# Altium PCB B293A MiRLIN Integrated PIC32.PcbDoc (part 2 of 3)
Units mm, origin at the board's own origin, x right, y up, seen from the top; angles counter-clockwise.
Board outline 134.25 x 90.25 mm, 4 copper layers (Component Side, Ground Plane, Power Plane, Solder Side), stack 0.651 mm thick; 223 components, 154 nets, 813 pads, 160 vias.
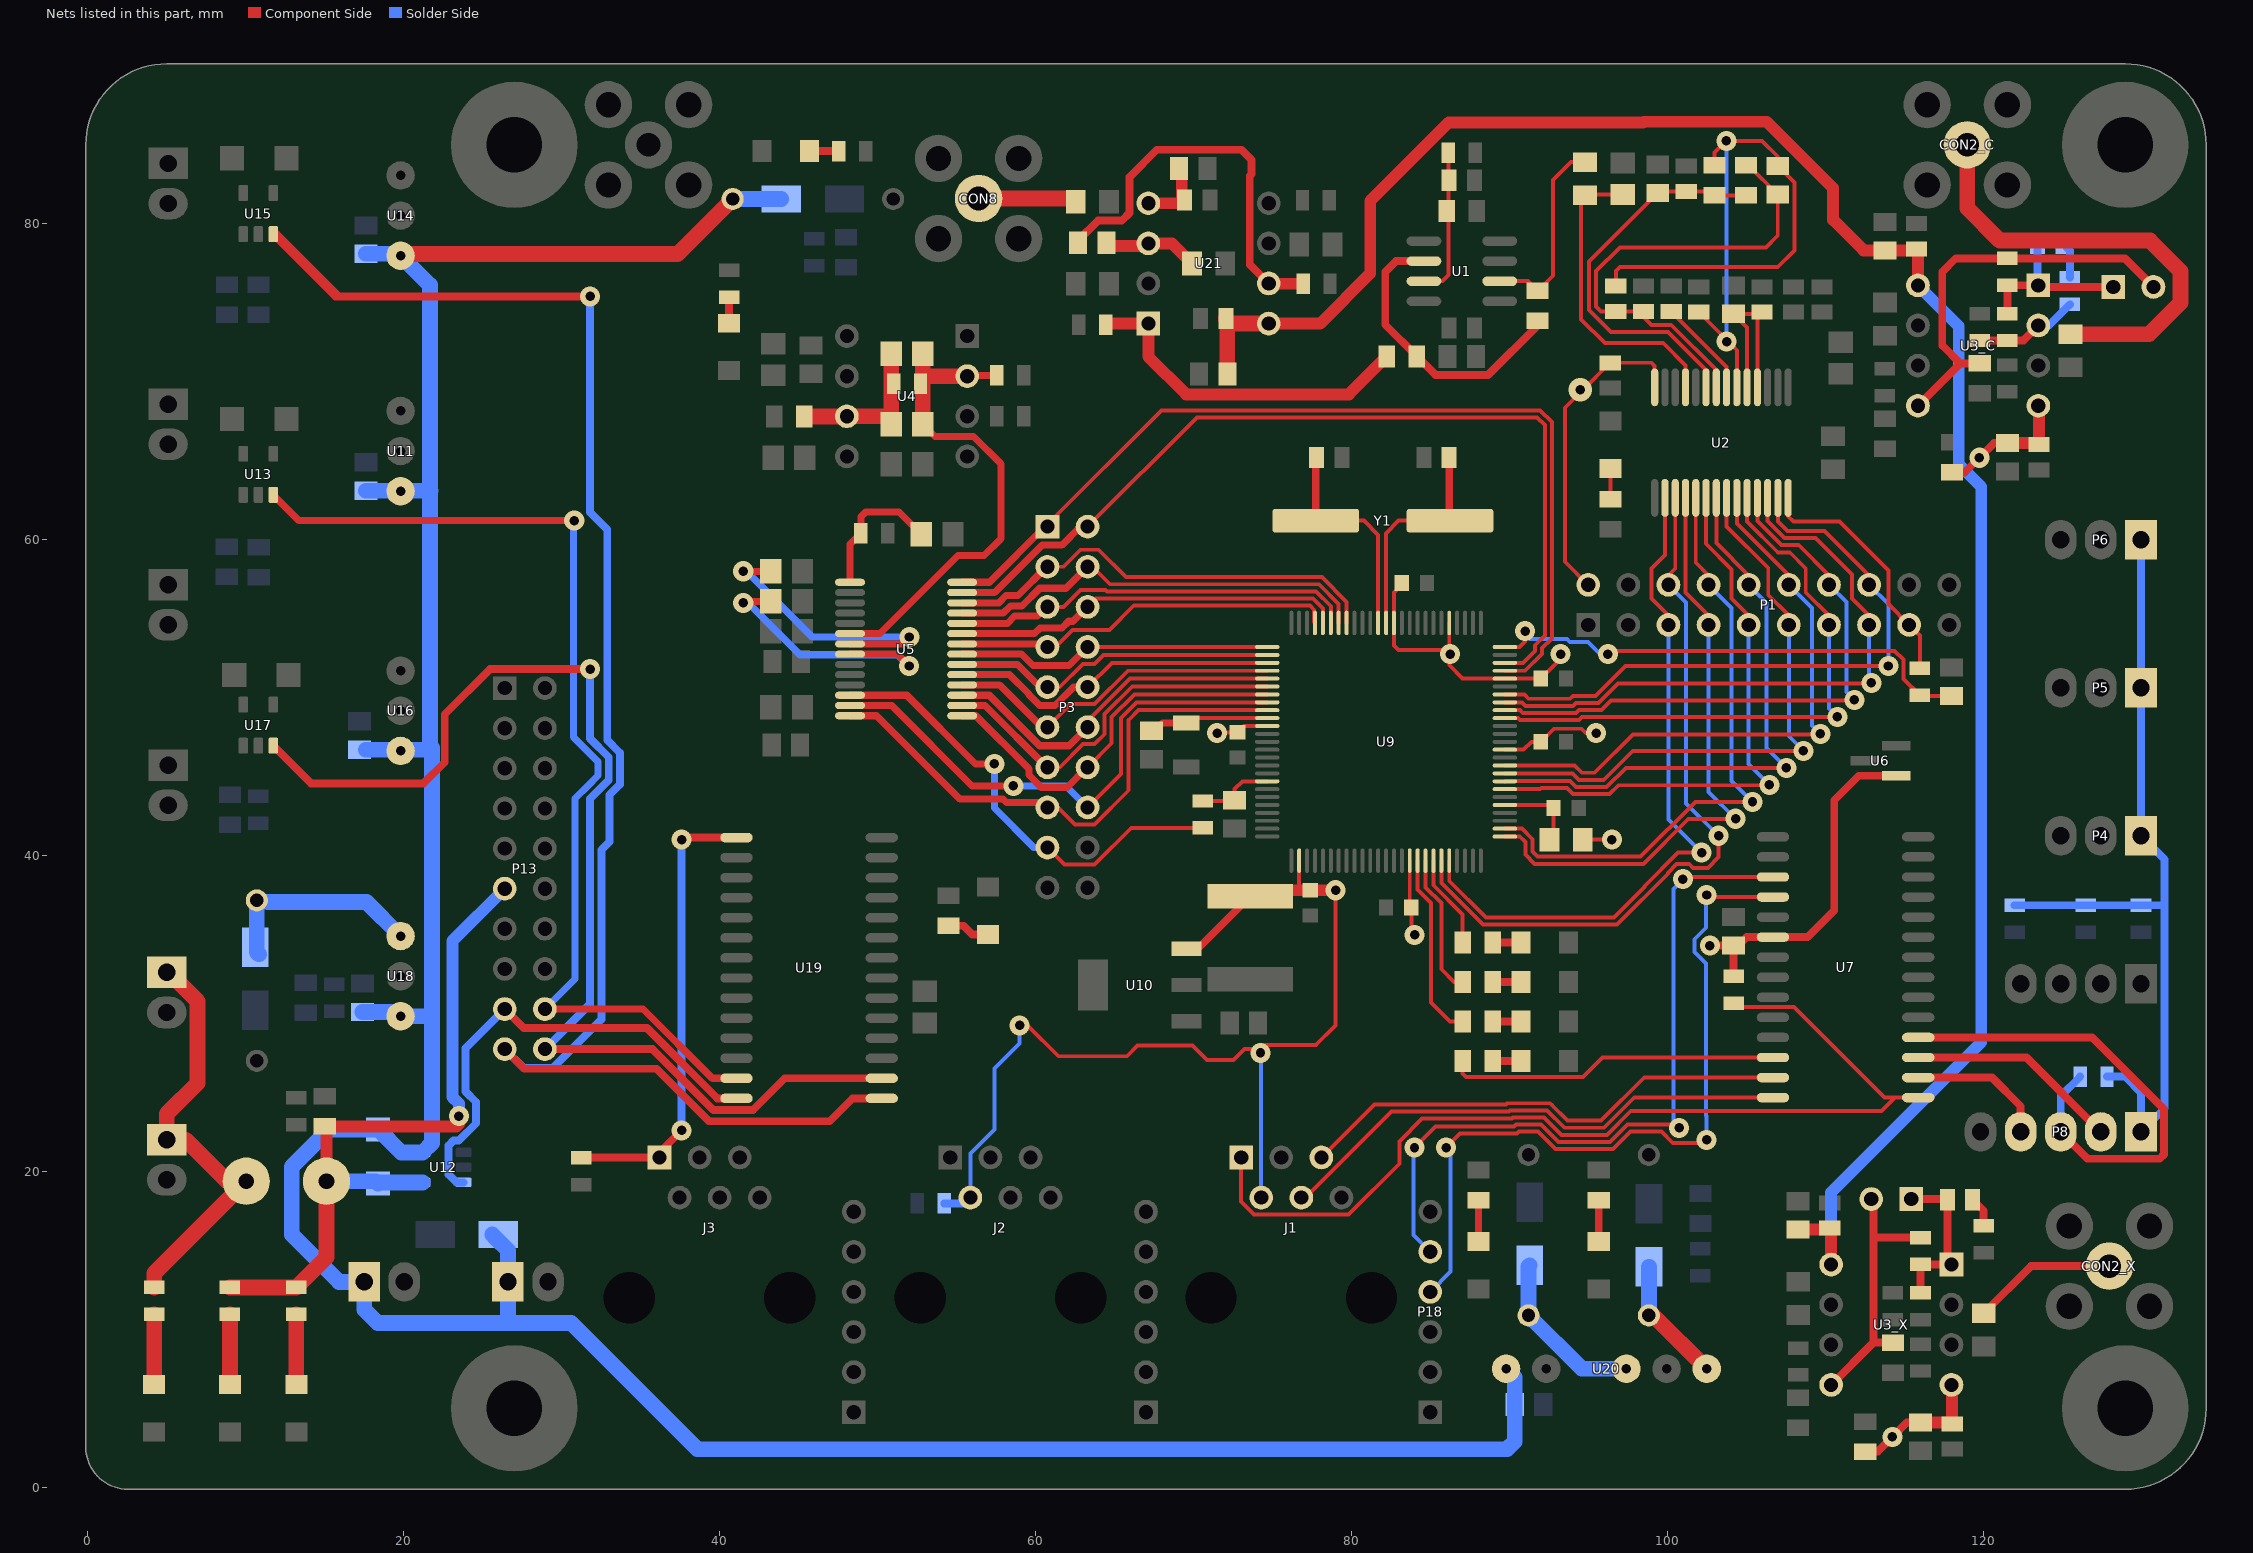
[diagram p4: the nets of this part, all layers, seen from the top]

## Part data
C1 C4 C5 C7 C8 C10 C11 C13 C14 C15 C17: library part CMP-1036-04421-1, "CAP 100nF 50V ±20% 0805 (2012 Metric) Thickness 0.75mm SMD"
C2 C6 C9 C12 C19_C C19_X C22_C C22_X C25 C32 C35 C37 C43 C51 C52 C53 C54 C55 C57 C61: library part CMP-1036-04933-1, "CAP 10uF 25V ±20% 0805 (2012 Metric) Thickness 1.45mm SMD"
C3: library part CMP-1036-03122-1, "CAP 1.5nF 50V ±10% 0805 (2012 Metric) Thickness 0.75mm SMD"
C16: library part CMP-1036-04844-1, "CAP 2.2uF 50V ±10% 0805 (2012 Metric) Thickness 1.45mm SMD"
C18_C C18_X: library part CMP-1036-01615-1, "CAP 47pF 50V ±5% 0805 (2012 Metric) Thickness 0.75mm SMD"
C20_C C20_X C21_C C21_X C58 C60: library part CMP-1036-03830-1, "CAP 10nF 25V ±10% 0805 (2012 Metric) Thickness 0.75mm SMD"
C23: library part CMP-1036-03591-1, "CAP 4.7nF 50V ±10% 0805 (2012 Metric) Thickness 0.75mm SMD"
C24: library part CMP-1036-02672-1, "CAP 470pF 50V ±10% 0805 (2012 Metric) Thickness 1mm SMD"
C26 C27 C28 C29 C30 C31 C33 C34 C56: library part CMP-1036-04423-1, "CAP 100nF 50V ±20% 0805 (2012 Metric) Thickness 1mm SMD"
C36: library part CMP-1036-04456-1, "CAP 120nF 50V ±20% 0805 (2012 Metric) Thickness 1.45mm SMD"
C38: library part CMP-1037-04201-1, "CAP 100nF 50V ±10% 1206 (3216 Metric) Thickness 1.7mm SMD"
C39 C42: library part CMP-1036-04756-1, "CAP 1uF 25V ±20% 0805 (2012 Metric) Thickness 1mm SMD"
C40 C41: library part CMP-1036-01043-1, "CAP 15pF 50V ±10% 0805 (2012 Metric) Thickness 0.75mm SMD"
C44 C45 C46 C47 C48 C49 C50: library part CMP-1035-02592-1, "CAP 100nF 50V ±10% 0603 (1608 Metric) Thickness 1mm SMD"
C59: library part CMP-1036-02975-1, "CAP 1nF 50V ±5% 0805 (2012 Metric) Thickness 0.75mm SMD"
C62: library part CMP-1042-00785-1, "CAP 47uF 25V -20% to +80% 2220 (5750 Metric) Thickness 2.2mm SMD"
D1 D2 D3 D4 D5: library part CMP-0639-00001-1, "Surface Mount Glass Passivated Rectifier, 1000V, 1 A, -65 to 125 degC, 2-Pin SMA Package, RoHS, Tape and Reel"
F1: library part "Fuse Poly 0.4A", "POLYSWITCH, RADIAL, 0.4A"
J1 J2 J3: "Right Angle, Standard Profile, Flush Mount PCB Jack"
L1: library part "LED 1206"
L2 L3 L4 L5: library part Inductor, "Power Inductor"
LED1 LED3: library part "LED 1206 RED", "LED, ALINGAP, SMD, 1206, RED"
LED2 LED5 LED6 LED7 LED8 LED9 LED10 LED11 LED12: library part "LED 1206 GREEN", "LED, SMD, 1206, CLR LENS, GREEN"
LED4: library part "LED 1206 YELLOW", "LED, ALINGAP, SMD, 1206, YELLOW"
P1 P3 P13: "Header, 10-Pin, Dual row"
P2_C P2_X: "Header, 2-Pin"
P4 P5 P6: "MOLEX - 70543-0037 - WIRE-BOARD CONNECTOR HEADER 3POS, 2.54MM"
P7: "MOLEX - 70543-0108 - CONNECTOR, HEADER, 4POS, 1ROW, 2.54MM"
P8: "MOLEX - 70543-0004 - CONNECTOR, HEADER, 5POS, 1ROW, 2.54MM"
P9 P10 P11 P12 P14 P15 P16 P17: "MOLEX - 70543-0106 - CONNECTOR, HEADER, 2POS, 1ROW, 2.54MM"
P18 P19 P20: "Header, 6-Pin"
R1 R2 R4 R5 R7: library part CMP-1013-00080-1, "1K8 0.125W 5% 0805 (2012 Metric)  SMD"
R3: library part CMP-1013-00042-1, "47R 0.125W 5% 0805 (2012 Metric)  SMD"
R6: library part CMP-1013-00491-1, "680R 0.125W 1% 0805 (2012 Metric)  SMD"
R8: library part CMP-1013-00623-1, "10K 0.125W 1% 0805 (2012 Metric)  SMD"
R9 R32 R37 R38 R39 R42 R43 R48 R50 R51 R52 R54 R56 R59 R61 R70: library part CMP-1013-00074-1, "1K 0.125W 5% 0805 (2012 Metric)  SMD"
R10_C R10_X: library part CMP-1013-00078-1, "1K5 0.125W 5% 0805 (2012 Metric)  SMD"
R11_C R11_X: library part CMP-1013-00122-1, "100K 0.125W 5% 0805 (2012 Metric)  SMD"
R12_C R12_X: library part CMP-1013-00126-1, "150K 0.125W 5% 0805 (2012 Metric)  SMD"
R13_C R13_X R14_C R14_X R27 R28 R29 R30 R31 R33 R34 R49 R55 R57 R58 R62 R72: library part CMP-1013-00098-1, "10K 0.125W 5% 0805 (2012 Metric)  SMD"
R15_C R15_X R16_C R16_X R65 R67 R69: library part CMP-1013-00050-1, "100R 0.125W 5% 0805 (2012 Metric)  SMD"
R17_C R17_X R66: library part CMP-1013-00108-1, "27K 0.125W 5% 0805 (2012 Metric)  SMD"
R18_C R18_X: library part CMP-1013-00062-1, "330R 0.125W 5% 0805 (2012 Metric)  SMD"
R19_C R19_X R20_C R20_X: library part CMP-1013-00076-1, "1K2 0.125W 5% 0805 (2012 Metric)  SMD"
R21 R22 R23 R25 R63 R64: library part CMP-1013-00082-1, "2K2 0.125W 5% 0805 (2012 Metric)  SMD"
R24: library part CMP-1013-00054-1, "150R 0.125W 5% 0805 (2012 Metric)  SMD"
R26 R47: library part CMP-1013-00094-1, "6K8 0.125W 5% 0805 (2012 Metric)  SMD"
R35: library part CMP-1013-00026-1, "10R 0.125W 5% 0805 (2012 Metric)  SMD"
R36 R45 R60: library part CMP-1013-00058-1, "220R 0.125W 5% 0805 (2012 Metric)  SMD"
R40: library part RES_0R1, "RESISTOR, THICK, 0.1OHM, 0.25W, 1%, 1206"
R41 R46 R53: library part RES_0R022, "RESISTOR, CURRENT SENSE, 0R022, 0.5W, 1%"
R44: library part CMP-1013-00064-1, "390R 0.125W 5% 0805 (2012 Metric)  SMD"
R68: library part CMP-1013-00086-1, "3K3 0.125W 5% 0805 (2012 Metric)  SMD"
R71: library part CMP-1013-00284-1, "10R 0.125W 1% 0805 (2012 Metric)  SMD"
U1: library part CMP-0018-00355-1, "Wideband Current Feedback Operational Amplifier with Disable, 5 to 12 V, -40 to 85 degC, 8-pin SOIC (D8), Green (RoHS & no Sb/Br)"
U2: library part CMP-0003-00136-1, "12-Bit, 20 MSPS ADC Internal / External Reference, Flexible Input between 2 and 5 Vpp, Out of Range Indicator, -40 to 85 degC, 28-pin SOP (DB28), Green (RoHS & no Sb/Br)"
U3_C U3_X: library part CMP-0272-01557-2, "High Precision, Low Noise Operational Amplifier, 5 to 36 V, -55 to 125 degC, 8-pin DIP (P8), Green (RoHS & no Sb/Br)"
U4: library part CMP-0384-00210-1, "Single Channel Low Noise Operational Amplifier, 63 MHz BW, 17 V/us SR, Industrial, 8-pin DIP (N-8), Tube"
U6: library part CMP-0192-00221-1, "Low-Power Linear Active Thermistor IC, 3-Pin SOT-23, Extended Temperature, Tape and Reel"
U7 U19: library part CMP-0115-02502-1, "Flash Microcontroller with XLP Technology, 20 MHz, 24 I/O, -40 to 125 degC, 28-pin SOIC (SO28), Tube"
U9: library part CMP-0048-00315-1, "High Performance 80 MHz MIPS-Based 32-Bit Flash Microcontroller with USB, CAN and Ethernet, 512KB Program Memory, 100-pin TQFP, Industrial Temperature"
U10: library part CMP-0136-00483-1, "500mA Fixed Output CMOS LDO, 3-Pin SOT-223, Extended Temperature"
U11: library part "TSR-1 Series DC-DC 15V", "CONVERTER, DC TO DC, 24V TO 15V, 15W"
U12: "CURRENT MONITOR, PRECISION, 40V"
U14: library part "TSR-1 Series DC-DC 9V", "DC/DC CONVERTER, 9V, 1A,"
U16 U18: library part "TSR-1 Series DC-DC 5V", "CONVERTER, DC/DC, 5V, 1A, SIP"
U20: library part "TMH2 Series Dual DC-DC", "Isolated output"
U21: library part CMP-0271-00383-1, "High Precision, Low Noise Operational Amplifier, 5 to 36 V, -55 to 125 degC, 8-pin DIP (P8), Green (RoHS & no Sb/Br)"
Y1: library part "SMD Crystal 8HMz HC-49", "CRYSTAL, 8MHZ, 16PF, SMD"

## Free pads (board coordinates)
  round 8 hole 3.5: 0(129,85) 1(129,5) 2(27,5) 3(27,85)

## Via types
v1: diameter 1.27, hole 0.6, Component Side to Solder Side, 155 vias
v2: diameter 1.5, hole 0.6, Component Side to Solder Side, 5 vias

## Nets (pads, with @x,y where several pads share a name; then routed paths per layer and width w, separated by ;. In a path a pad name is that pad's centre, name@x,y a point inside that pad or via, vN(x,y) a via of type N, cw(c..) or ccw(c..) an arc to the next point about the centre after c; other vN are vias at no path point)
+5V: C19_C.2 C19_X.2 C20_C.2 C20_X.2 C57.2 C58.2 U3_C.8 U3_X.8 U21.8 | length 134.7
  Component Side w0.5: C58.2@72.15,74 72.15,74.28 C58.2@72.16,74.29 ; C58.2@72.26,73.49 72.41,73.64 C58.2@72.45,73.68
  Component Side w0.75: U21.8@74.77,73.68 78.018,73.68 81.2,76.862 81.2,81.45 86.171,86.421 98.474,86.421 98.513,86.46 106.303,86.46 110.507,82.257 110.507,80.243 112.44,78.31 C19_C.2@113.79,78.31 115.69,78.31 C20_C.2@115.79,78.41 115.88,78.32 U3_C.8@115.88,76.1 ; C19_X.2@108.29,16.31 110.19,16.31 C20_X.2@110.29,16.41 110.38,16.32 U3_X.8@110.38,14.1
  Component Side w1: C58.2@72.05,74 C58.2@72.15,73.9 ; C57.2@72.15,70.5 C58.2@72.15,73.9 ; U21.8@74.77,73.68 72.45,73.68 72.37,73.68 C58.2@72.15,73.9
  Solder Side w0.75: U3_X.8@110.38,14.1 110.38,18.67 119.885,28.175 119.885,63.354 118.458,64.78 118.458,73.522 U3_C.8@115.88,76.1
-5V: C21_C.2 C21_X.2 C22_C.2 C22_X.2 C60.2 C61.2 R12_C.2 R12_X.2 U3_C.4 U3_X.4 U21.4 | length 21.4
  Component Side w0.5: R12_X.2@112.54,2.26 113.34,2.26 v1(114.265,3.185) 115.19,4.11 C22_X.2@116.04,4.11 ; R12_C.2@118.04,64.26 118.84,64.26 v1(119.765,65.185) 120.69,66.11 C22_C.2@121.54,66.11
  Component Side w0.75: U21.4@67.15,81.3 69.07,81.3 69.26,81.49 69.26,81.5 C61.2@69.26,83.09 ; C22_X.2@116.04,4.11 117.94,4.11 C21_X.2@118.04,4.01 118.04,6.44 U3_X.4@118,6.48 ; C22_C.2@121.54,66.11 123.44,66.11 C21_C.2@123.54,66.01 123.54,68.44 U3_C.4@123.5,68.48
ADC0: P1.5 U2.2 U9.21 | length 43.5
  Component Side w0.25: U9.21@86.2,39.675 86.2,38.391 88.515,36.076 96.634,36.076 98.56,38.002 98.56,38.054 100.683,40.177 v1(102.177,40.177) ; U2.2@99.86,62.645 99.86,59.04 99.005,58.185 99.005,56.275 P1.5@100.08,55.2
  Solder Side w0.25: P1.5@100.08,54.6 100.08,42.274 v1(102.177,40.177)
ADC1: P1.6 U2.3 U9.20 | length 45.7
  Component Side w0.25: U9.20@85.7,39.675 85.7,38.254 88.328,35.626 96.82,35.626 100.04,38.846 100.04,38.898 100.602,39.46 101.397,39.46 101.64,39.217 102.575,39.217 103.252,39.894 v1(103.252,41.252) ; P1.6@100.08,57.74 100.51,58.17 U2.3@100.51,62.645
  Solder Side w0.25: P1.6@100.08,57.14 101.2,56.02 101.2,43.304 v1(103.252,41.252)
ADC2: P1.7 U2.4 U9.26 | length 38
  Component Side w0.25: U9.26@89.725,41.2 90.664,41.2 91.021,40.843 91.021,40.058 91.604,39.475 95.596,39.475 98.51,39.475 101.336,42.301 v1@104.301,42.301 ; U2.4@101.16,62.645 101.16,56.66 P1.7@102.62,55.2 ; v1@104.327,42.301 v1@104.301,42.301 ; v1(104.327,42.327) v1@104.301,42.301
  Solder Side w0.25: P1.7@102.62,54.6 102.62,44.034 v1(104.327,42.327)
ADC3: P1.8 U2.5 U9.27 | length 38.4
  Component Side w0.25: U9.27@89.725,41.7 90.801,41.7 91.471,41.03 91.471,40.244 91.79,39.925 95.41,39.925 98.323,39.925 101.8,43.402 v1(105.402,43.402) ; U2.5@101.81,62.645 101.81,58.55 P1.8@102.62,57.74
  Solder Side w0.25: P1.8@102.62,57.14 104.085,55.675 104.085,44.718 v1(105.402,43.402)
ADC4: P1.9 U2.6 U9.32 | length 36.4
  Component Side w0.25: U9.32@89.725,44.2 91.95,44.2 92.025,44.275 93.658,44.275 94.043,43.89 96.357,43.89 96.917,44.45 v1@106.45,44.45 ; U2.6@102.46,62.645 102.46,59.74 104.085,58.115 104.085,56.275 P1.9@105.16,55.2 ; v1@106.476,44.45 v1@106.45,44.45 ; v1(106.476,44.476) v1@106.45,44.45
  Solder Side w0.25: P1.9@105.16,54.6 105.16,45.793 v1(106.476,44.476)
ADC5: P1.10 U2.7 U9.33 | length 36.8
  Component Side w0.25: U9.33@89.725,44.7 89.75,44.725 93.844,44.725 94.229,44.34 96.17,44.34 97.382,45.551 v1(107.551,45.551) ; U2.7@103.11,62.645 103.11,59.79 P1.10@105.16,57.74
  Solder Side w0.25: P1.10@105.16,57.14 106.302,55.998 106.302,46.801 v1(107.551,45.551)
ADC6: P1.11 U2.8 U9.34 | length 37.3
  Component Side w0.25: U9.34@89.725,45.2 94.006,45.2 94.416,44.79 95.984,44.79 97.82,46.626 v1(108.626,46.626) ; U2.8@103.76,62.645 103.76,60.84 106.4,58.2 106.4,56.5 P1.11@107.7,55.2
  Solder Side w0.25: P1.11@107.7,54.6 107.7,47.552 v1(108.626,46.626)
ADC7: P1.12 U2.9 U9.35 | length 37.7
  Component Side w0.25: U9.35@89.725,45.7 94.142,45.7 94.602,45.24 95.397,45.24 97.832,47.675 v1@109.675,47.675 ; U2.9@104.41,62.645 104.41,61.03 P1.12@107.7,57.74 ; v1@109.701,47.675 v1@109.675,47.675 ; v1(109.701,47.701) v1@109.675,47.675
  Solder Side w0.25: P1.12@107.7,57.14 109.165,55.675 109.165,48.237 v1(109.701,47.701)
ADC8: P1.13 U2.10 U9.41 | length 37.3
  Component Side w0.25: U9.41@89.725,48.7 90.545,48.7 90.67,48.575 94.417,48.575 94.602,48.76 110.76,48.76 v1(110.776,48.776) ; U2.10@105.06,62.645 105.06,61.14 107,59.2 107.76,59.2 108.775,58.185 108.775,56.665 P1.13@110.24,55.2
  Solder Side w0.25: P1.13@110.24,54.6 110.24,49.311 v1(110.776,48.776)
ADC9: P1.14 U2.11 U9.42 | length 37.9
  Component Side w0.25: U9.42@89.725,49.2 90.681,49.2 90.856,49.025 94.231,49.025 94.416,49.21 95.84,49.21 96.455,49.824 v1@111.824,49.824 ; U2.11@105.71,62.645 105.71,61.181 107.241,59.65 108.33,59.65 P1.14@110.24,57.74 ; v1@111.85,49.824 v1@111.824,49.824 ; v1(111.85,49.85) v1@111.824,49.824
  Solder Side w0.25: P1.14@110.24,57.14 111.34,56.04 111.34,50.36 v1(111.85,49.85)
ADC10: P1.15 U2.12 U9.43 | length 38.9
  Component Side w0.25: U9.43@89.725,49.7 90.818,49.7 91.043,49.475 94.044,49.475 94.229,49.66 95.654,49.66 96.893,50.899 v1@112.925,50.899 ; U2.12@106.36,62.645 106.36,61.167 107.427,60.1 109.4,60.1 111.705,57.795 111.705,56.275 P1.15@112.78,55.2
  Solder Side w0.25: P1.15@112.78,54.6 112.78,51.07 v1(112.925,50.925)
ADC11: P1.16 U2.13 U9.44 | length 39.6
  Component Side w0.25: U9.44@89.725,50.2 90.954,50.2 91.229,49.925 93.858,49.925 94.043,50.11 95.468,50.11 97.358,52 v1(114,52) ; U2.13@107.01,62.645 107.01,61.154 107.614,60.55 109.97,60.55 P1.16@112.78,57.74
  Solder Side w0.25: P1.16@112.78,57.14 114,55.92 v1(114,52)
ADC_CLK: P1.17 R35.2 U2.14 | length 15.9
  Component Side w0.25: U2.14@107.66,62.645 107.66,61.48 108,61.14 110.9,61.14 114,58.04 114,55.92 P1.17@115.32,54.6 116,53.92 R35.2@116,51.85
BAT: F1.2 P13.11 R40.2 R42.2 R49.2 R72.2 U12.4 | length 46.4
  Component Side w0.75: F1.2@15.11,19.38 15.11,22.74 R42.2@15,22.85 23.35,22.85 23.5,23 v1(23.5,23.5)
  Component Side w1: R49.2@9,12.65 R72.2@13.2,12.65 15.11,14.56 F1.2@15.11,19.38
  Solder Side w0.75: v1(23.5,23.5) 23.5,24.299 23.09,24.709 23.09,34.59 P13.11@26.4,37.9
  Solder Side w1: F1.2@15.11,19.38 18.231,19.38 R40.2@18.38,19.231 18.449,19.3 U12.4@21.195,19.3
CLK: P3.17 R36.2 U5.26 | length 29.4
  Component Side w0.25: P3.17@60.719,40.505 P3.17@60.76,40.505 61.835,39.43 63.745,39.43 66.065,41.75 R36.2@70.6,41.75
  Component Side w0.45: U5.26@48.26,50.15 51.85,50.15 56.2,45.8 v1(57.4,45.8)
  Solder Side w0.45: v1(57.4,45.8) 57.4,43 59.895,40.505 P3.17@60.76,40.505
DAC0: P3.1 U5.14 U9.47 | length 59.8
  Component Side w0.25: P3.1@60.76,60.975 67.976,68.191 91.946,68.191 92.7,67.436 92.7,53.752 92.075,53.127 92.075,52.773 91.002,51.7 U9.47@89.725,51.7
  Component Side w0.45: U5.14@55.36,57.3 57.085,57.3 60.61,60.825 P3.1@60.76,60.825
DAC1: P3.2 U5.13 U9.48 | length 58.5
  Component Side w0.25: P3.2@63.3,60.825 70.216,67.741 91.759,67.741 92.25,67.25 92.25,53.939 91.625,53.313 91.625,52.959 90.866,52.2 U9.48@89.725,52.2
  Component Side w0.45: U5.13@55.36,56.65 57.42,56.65 60.42,59.65 61.686,59.65 62.861,60.825 P3.2@63.3,60.825
DAC2: P3.3 U5.12 U9.68 | length 28.4
  Component Side w0.25: P3.3@60.76,58.285 61.78,58.285 62.855,59.36 64,59.36 65.735,57.625 78.132,57.625 79.7,56.057 U9.68@79.7,54.725
  Component Side w0.45: U5.12@55.36,56 57.689,56 58.144,56.455 58.889,56.455 P3.3@60.719,58.285
DAC3: P3.4 U5.11 U9.69 | length 27.2
  Component Side w0.25: P3.4@63.3,58.285 63.6,58.285 64.71,57.175 77.946,57.175 79.2,55.921 U9.69@79.2,54.725
  Component Side w0.45: U5.11@55.36,55.35 57.958,55.35 58.413,55.805 59.158,55.805 60.273,56.92 61.935,56.92 P3.4@63.3,58.285
DAC4: P3.5 U5.10 U9.70 | length 25.7
  Component Side w0.25: P3.5@60.76,55.745 61.78,55.745 62.855,56.82 64.429,56.82 64.524,56.725 77.759,56.725 78.7,55.784 U9.70@78.7,54.725
  Component Side w0.45: U5.10@55.36,54.7 58.227,54.7 58.682,55.155 60.129,55.155 60.719,55.745 P3.5@60.76,55.745
DAC5: P3.6 U5.9 U9.71 | length 24.9
  Component Side w0.25: P3.6@63.3,55.745 63.83,56.275 77.573,56.275 78.2,55.648 U9.71@78.2,54.725
  Component Side w0.45: U5.9@55.36,54.05 59.943,54.05 60.307,54.413 61.687,54.413 62.104,54.83 62.385,54.83 P3.6@63.3,55.745
DAC6: P3.7 U5.8 U9.72 | length 24.4
  Component Side w0.25: P3.7@60.76,53.205 61.268,53.205 62.343,54.28 64.68,54.28 66.225,55.825 77.386,55.825 77.65,55.561 77.65,54.775 U9.72@77.7,54.725
  Component Side w0.45: U5.8@55.36,53.4 60.565,53.4 P3.7@60.76,53.205
DAC7: P3.8 U5.7 U9.76 | length 21.4
  Component Side w0.25: P3.8@63.3,53.205 74.67,53.205 U9.76@74.675,53.2 73.4,53.2
  Component Side w0.45: U5.7@55.36,52.75 59.124,52.75 59.844,52.03 62.125,52.03 P3.8@63.3,53.205
DAC8: P3.9 U5.6 U9.77 | length 20.8
  Component Side w0.25: P3.9@60.76,50.665 61.538,50.665 63.003,52.13 63.745,52.13 64.315,52.7 U9.77@74.675,52.7
  Component Side w0.45: U5.6@55.36,52.1 58.854,52.1 60.289,50.665 P3.9@60.76,50.665
DAC9: P3.10 U5.5 U9.78 | length 21.3
  Component Side w0.25: P3.10@63.3,50.665 64.835,52.2 U9.78@74.675,52.2
  Component Side w0.45: U5.5@55.36,51.45 58.354,51.45 59.585,50.219 59.585,50.178 60.273,49.49 61.247,49.49 62.422,50.665 P3.10@63.3,50.665
DAC10: P3.11 U5.4 U9.79 | length 21.9
  Component Side w0.25: P3.11@60.76,48.125 62.225,49.59 63.745,49.59 65.855,51.7 U9.79@74.675,51.7
  Component Side w0.45: U5.4@55.36,50.8 57.735,50.8 60.41,48.125 P3.11@60.76,48.125
DAC11: P3.12 U5.3 U9.80 | length 22.6
  Component Side w0.25: P3.12@63.3,48.125 63.3,48.508 65.992,51.2 U9.80@74.675,51.2
  Component Side w0.45: U5.3@55.36,50.15 57.073,50.15 60.273,46.95 62.125,46.95 P3.12@63.3,48.125
DAC12: P3.13 U5.2 U9.81 | length 23.8
  Component Side w0.25: P3.13@60.76,45.585 61.538,45.585 63.003,47.05 63.745,47.05 64.375,47.68 64.375,48.947 66.128,50.7 U9.81@74.675,50.7
  Component Side w0.45: U5.2@55.36,49.5 56.804,49.5 60.719,45.585 P3.13@60.76,45.585
DAC13: P3.14 U5.1 U9.82 | length 24.8
  Component Side w0.25: P3.14@63.3,45.585 64.825,47.11 64.825,48.761 66.265,50.2 U9.82@74.675,50.2
  Component Side w0.45: U5.1@55.36,48.85 56.225,48.85 59.585,45.49 59.585,45.098 60.368,44.315 61.989,44.315 63.259,45.585 P3.14@63.3,45.585
DAC14: P3.15 U5.28 U9.84 | length 34.9
  Component Side w0.25: P3.15@60.76,43.045 61.433,43.045 62.508,41.97 63.745,41.97 65.906,44.131 65.906,48.569 66.537,49.2 U9.84@74.675,49.2
  Component Side w0.45: U5.28@48.26,48.85 49.931,48.85 55.214,43.566 57.944,43.566 58.161,43.35 60.455,43.35 P3.15@60.76,43.045
DAC15: P3.16 U5.27 U9.83 | length 33.9
  Component Side w0.25: P3.16@63.3,43.045 65.418,45.163 65.418,48.717 66.401,49.7 U9.83@74.675,49.7
  Component Side w0.45: U5.27@48.26,49.5 50.9,49.5 55.99,44.41 v1(58.6,44.41)
  Solder Side w0.45: v1(58.6,44.41) 61.935,44.41 P3.16@63.3,43.045
IM_BAT: P13.17 U12.3 U19.14 | length 30.9
  Component Side w0.5: P13.17@26.4,30.28 27.6,29.08 35.4,29.08 39.855,24.625 U19.14@41.07,24.625
  Solder Side w0.5: U12.3@23.795,19.3 23.353,19.3 22.845,19.808 22.845,21.642 23.153,21.95 23.484,21.95 24.585,23.051 24.585,24.381 23.915,25.051 23.915,27.795 P13.17@26.4,30.28
IM_MMIC: P13.20 U17.3 U19.16 | length 75.8
  Component Side w0.5: U17.3@11.745,46.96 14.135,44.57 21.26,44.57 22.6,45.91 22.6,48.936 25.464,51.8 v1(31.8,51.8) ; P13.20@28.94,27.74 35.75,27.74 39.615,23.875 42.106,23.875 44.126,25.895 U19.16@50.27,25.895
  Solder Side w0.5: P13.20@28.94,27.74 31.8,30.6 31.8,43.596 32.985,44.781 32.985,46.219 31.8,47.404 v1(31.8,51.8)
IM_MULTI: P13.19 U15.3 U19.15 | length 108.8
  Component Side w0.5: P13.19@26.4,27.74 27.64,26.5 36,26.5 39.325,23.175 46.975,23.175 48.425,24.625 U19.15@50.27,24.625 ; v1(31.8,75.4) 15.889,75.4 ; 15.889,75.4 11.944,79.345 U15.3@11.745,79.345 15.69,75.4 15.889,75.4
  Solder Side w0.5: P13.19@26.4,27.74 27.6,26.54 29.437,26.54 32.515,29.618 32.515,40.349 33.035,40.869 33.035,43.841 33.685,44.491 33.685,46.509 32.885,47.309 32.885,60.649 31.8,61.734 v1(31.8,75.4)
IM_VCO: P13.18 U13.3 U19.13 | length 66.7
  Component Side w0.45: U13.3@11.745,62.835 13.38,61.2 v1(30.8,61.2) ; P13.18@28.94,30.28 35.154,30.28 39.54,25.895 U19.13@41.07,25.895
  Solder Side w0.45: P13.18@28.94,30.28 30.85,32.19 30.85,43.601 31.689,44.44 32.31,45.061 32.31,45.939 31.689,46.56 30.74,47.509 30.74,61.14 v1(30.8,61.2)
JOY_B: P8.3 R31.1 U7.4 | length 31.7
  Component Side w0.5: U7.4@115.895,28.48 126.906,28.48 131.45,23.936 131.45,21.064 131.186,20.8 126.62,20.8 P8.3@124.92,22.5
  Solder Side w0.5: P8.3@124.92,22.5 124.92,24.77 R31.1@126.15,26
JOY_X: P8.2 U7.3 | length 13.5
  Component Side w0.5: U7.3@115.895,27.21 122.75,27.21 P8.2@127.46,22.5
JOY_Y: P8.4 U7.2 | length 8.9
  Component Side w0.5: U7.2@115.895,25.94 120.56,25.94 122.38,24.12 P8.4@122.38,22.5
LED: R32.2 U7.26 | length 21
  Component Side w0.25: R32.2@87.05,27 87.05,26.2 87.275,25.975 94.675,25.975 95.91,27.21 U7.26@106.695,27.21
LED0: R37.2 U9.19 | length 5.2
  Component Side w0.25: U9.19@85.2,39.675 85.2,38.118 87.05,36.268 87.05,35.25 ; R37.2@86.685,34.315 R37.2@86.7,34.3
LED1: R38.2 U9.18 | length 9
  Component Side w0.25: U9.18@84.7,39.675 84.7,37.982 85.7,36.982 85.7,32.8 86.5,32 R38.2@87.05,32
LED2: R39.2 U9.17 | length 11.8
  Component Side w0.25: U9.17@84.2,39.675 84.2,37.845 85.05,36.995 85.05,30.7 86.25,29.5 R39.2@87.05,29.5
MCLR#: J3.1 R58.2 U19.1 | length 29.1
  Component Side w0.5: R58.2@31.25,20.85 31.28,20.88 J3.1@36.195,20.88 ; J3.1@36.495,20.88 36.495,21.495 v1(37.6,22.6) ; v1(37.6,41) 37.735,41.135 U19.1@41.07,41.135
  Solder Side w0.5: J3.1@36.165,20.85 J3.1@36.195,20.88 ; v1(37.6,22.6) v1(37.6,41)
MON_MCLR#: J1.1 R27.2 U7.1 | length 63.5
  Component Side w0.25: J1.1@73.025,20.88 73.025,18.09 73.85,17.265 79.82,17.265 83.04,20.485 83.04,21.898 84.482,23.34 90.161,23.34 90.236,23.415 92.204,23.415 93.307,22.312 96.192,22.312 97.694,23.814 113.564,23.814 114.42,24.67 ; R27.2@104.2,30.65 104.455,30.395 108.025,30.395 113.75,24.67 114.42,24.67 ; U7.1@115.895,24.67 114.42,24.67
MON_PGEC: J1.5 U7.27 | length 31.6
  Component Side w0.25: J1.5@78.105,20.88 81.465,24.24 89.788,24.24 89.863,24.315 92.577,24.315 92.693,24.199 93.68,23.212 95.819,23.212 98.548,25.94 U7.27@106.695,25.94
MON_PGED: J1.4 U7.28 | length 33.4
  Component Side w0.25: J1.4@76.835,18.34 77.085,18.34 82.535,23.79 89.975,23.79 90.05,23.865 92.39,23.865 93.494,22.762 96.006,22.762 97.914,24.67 U7.28@106.695,24.67
MON_RX: P18.4 U7.18 | length 48.4
  Component Side w0.25: v1(86,21.5) 86.889,22.389 90.483,22.389 90.609,22.515 91.831,22.515 92.934,21.412 96.565,21.412 97.668,22.515 99.627,22.515 100.352,21.79 102.29,21.79 v1(102.5,22) ; v1(102.5,37.5) 102.63,37.37 U7.18@106.695,37.37
  Solder Side w0.25: P18.4@85,12.37 86.29,13.66 86.29,21.21 v1(86,21.5) ; v1(102.5,22) 102.5,23.501 102.47,23.531 102.47,33.172 101.74,33.902 101.74,34.698 102.47,35.428 102.47,37.47 v1(102.5,37.5)
MON_TX: P18.5 U7.17 | length 47.3
  Component Side w0.25: v1(84,21.5) 85.339,22.839 90.297,22.839 90.423,22.965 92.017,22.965 93.121,21.862 96.378,21.862 97.482,22.965 100.535,22.965 v1(100.75,22.75) ; v1(101,38.5) 101.14,38.64 U7.17@106.695,38.64
  Solder Side w0.25: v1(84,21.5) 83.925,21.425 83.925,15.985 P18.5@85,14.91 ; v1(100.75,22.75) 100.39,23.11 100.39,37.89 v1(101,38.5)
MON_VDD: C17.1 C36.1 C44.1 C45.1 C47.1 C48.1 C49.1 C50.1 C62.2 J1.2 J2.2 P1.2 P4.1 P5.1 P6.1 P8.1 R27.1 R28.2 R29.2 R30.2 R31.2 R34.1 R71.2 U2.28 U6.1 U7.20 U9.2 U9.16 U9.37 U9.46 U9.55 U9.62 U9.86 U10.3 | length 198.3
  Component Side w0.25: v1(59,29.25) 59.494,29.25 61.454,27.29 65.79,27.29 66.46,27.96 69.932,27.96 70.852,27.04 72.54,27.04 73.25,27.75 74.25,27.75 74.5,28 77.75,28 79,29.25 v1(79,37.8) ; v1@71.295,47.8 71.345,47.75 v1(71.5,47.75) ; v1@71.545,47.8 C50.1@72.8,47.8 73.2,48.2 U9.86@74.675,48.2 ; U9.2@76.7,39.675 76.7,38.1 76.775,38.025 ; C49.1@83.25,57.2 82.7,56.65 U9.62@82.7,54.725 82.7,53.3 83,53 v1@86.2,53 ; U9.16@83.7,39.675 83.7,36.8 C45.1@83.8,36.7 83.8,35.183 v1(84.004,34.979) ; U9.55@86.2,54.725 v1@86.2,53 ; U9.37@89.725,46.7 90.9,46.7 91.4,47.2 C47.1@92,47.2 92.825,48.025 94.575,48.025 94.85,47.75 v1(95.5,47.75) ; C48.1@91.8,51 91.6,51.2 U9.46@89.725,51.2 87.05,51.2 86.2,52.05 86.2,52.75 v1@86.2,53 ; C48.1@92,51.2 93.25,52.45 v1(93.25,52.75) ; R71.2@94.65,41 v1(96.5,41) ; P1.2@95,57.14 93.54,58.6 93.54,68.35 94.595,69.405 96.39,71.2 C17.1@96.4,71.2 99,71.2 99.21,70.99 U2.28@99.21,69.645
  Component Side w0.5: U10.3@69.55,34.1 70.275,34.1 C62.2@73.6,37.425 ; v1(102.7,34.3) C36.1@104.2,34.3 ; R27.1@104.2,32.35 C36.1@104.2,34.3 ; U6.1@114.5,45.05 112.135,45.05 110.581,43.496 110.581,36.524 108.887,34.83 U7.20@106.695,34.83 105.03,34.83 104.5,34.3 C36.1@104.2,34.3
  Component Side w0.75: C62.2@73.6,37.425 73.975,37.8 C44.1@77.4,37.8 v1(79,37.8)
  Solder Side w0.25: J2.2@55.88,18.34 55.88,21.13 57.415,22.665 57.415,26.523 59,28.108 v1(59,29.25) ; J1.2@74.295,18.34 74.295,27.455 v1(74.25,27.5) ; v1@95.4,47.8 95.45,47.75 v1(95.5,47.75) ; v1(74.25,27.5) 74.011,27.739 v1(74.25,27.5)
  Solder Side w0.5: R34.1@54.225,17.975 55.635,17.975 J2.2@55.79,18.13 ; R28.2@122,36.85 R29.2@126.5,36.85 R30.2@130,36.85 131.5,36.85 ; R31.2@127.85,26 129,26 130,25 P8.1@130,22.5 131.5,24 131.5,36.85 ; P6.1@130,60 P5.1@130,50.625 P4.1@130,41.25 131.5,39.75 131.5,36.85
  other v1: 86.25,52.75
  other v2: 94.5,69.5
NetC3_2: C3.2 R3.1 U2.25 | length 19.6
  Component Side w0.25: C3.2@97.2,81.85 94.85,81.85 R3.1@94.8,81.8 94.55,81.55 94.55,73.95 96.05,72.45 99.75,72.45 101.16,71.04 U2.25@101.16,69.645
NetC4_2: C4.2 U2.21 | length 6.3
  Component Side w0.25: C4.2@100.25,74.45 103.76,70.94 U2.21@103.76,69.645 U2.21@103.8,69.685
NetC5_2: C5.2 R4.2 R6.1 U1.3 | length 9.2
  Component Side w0.25: U1.3@84.6,76.365 85.765,76.365 86.15,76.75 86.15,80.8 86.15,82.75 R6.1@86.15,84.2
NetC6_1: C6.1 C7.1 C11.2 R7.1 U2.20 | length 43.2
  Component Side w0.25: C7.1@96.75,76.05 96.75,77 97,77.25 107,77.25 108.05,78.3 108.05,82.6 C6.1@107,83.65 107,84.25 106,85.25 v1(103.75,85.25) 103,84.5 R7.1@103,83.7 ; C11.2@102.01,74.4 C11.2@102,74.4 v1@103.65,72.75 ; v1@103.75,72.75 v1@103.65,72.75 ; U2.20@104.41,69.645 104.41,71.99 103.814,72.586 v1@103.65,72.75
  Solder Side w0.25: v1@103.75,72.75 v1@103.825,72.675 ; v1@103.75,72.75 v1(103.75,85.25)
  other v1: 103.763,72.534
NetC6_2: C6.2 C7.2 C8.2 R5.2 U2.22 | length 30.6
  Component Side w0.25: U2.22@103.11,69.645 103.11,70.748 100.258,73.6 99,73.6 98.5,74.1 C8.2@98.5,74.45 C7.2@96.75,74.45 95.8,74.45 95.5,74.75 95.5,77 97,78.5 106.25,78.5 107,79.25 C6.2@107,81.85 105.15,83.7 R5.2@105,83.7
NetC9_2: C9.2 C10.2 R5.1 R7.2 U2.23 | length 25
  Component Side w0.25: U2.23@102.46,69.645 102.46,70.748 100.058,73.15 96.44,73.15 95.05,74.54 95.05,77.6 C9.2@99.4,81.95 99.5,82.05 C10.2@101.2,82.05 102.75,82.05 R7.2@103,81.8 R5.1@105,81.8
NetC12_2: C12.2 C13.2 U2.18 U2.19 | length 11.6
  Component Side w0.25: U2.19@105.06,69.645 105.06,73.44 C12.2@104.2,74.3 C13.2@105.9,74.3 ; U2.18@105.71,69.645 105.71,74.11 C13.2@105.9,74.3 ; C13.2@106,74.4 C13.2@105.9,74.3
NetC18_C_1: C18_C.1 P2_C.1 R11_C.2 R14_C.2 U3_C.1 | length 11.2
  Component Side w0.5: R11_C.2@121.54,74.31 R14_C.2@121.54,76.11 123.49,76.11 U3_C.1@123.5,76.1 123.6,76 P2_C.1@128.25,76
  Solder Side w0.5: C18_C.1@123.45,78.75 123.45,76.15 U3_C.1@123.5,76.1
NetC18_C_2: C18_C.2 R10_C.2 | length 2.3
  Solder Side w0.5: C18_C.2@125.05,78.75 125.5,78.3 R10_C.2@125.5,76.6
NetC18_X_1: C18_X.1 P2_X.1 R11_X.2 R14_X.2 U3_X.1 | length 10
  Component Side w0.5: P2_X.1@115.46,18.25 117.5,18.25 117.64,18.11 C18_X.1@117.74,18.01 ; R11_X.2@116.04,12.31 R14_X.2@116.04,14.11 117.99,14.11 U3_X.1@118,14.1 ; U3_X.1@117.74,14.36 C18_X.1@117.74,18.01 ; C18_X.1@117.74,18.21 C18_X.1@117.74,18.01
NetC18_X_2: C18_X.2 R10_X.2 | length 1.9
  Component Side w0.5: C18_X.2@119.34,18.21 120.04,17.51 R10_X.2@120.04,16.56
NetC23_1: C23.1 C24.1 R21.2 R24.2 U4.6 | length 10.6
  Component Side w1: R24.2@45.35,67.8 48.05,67.8 U4.6@48.06,67.81 C24.1@50.87,67.81 ; C24.1@50.75,67.381 C24.1@50.87,67.615 ; C24.1@50.87,67.32 C24.1@50.87,67.615 ; C23.1@50.87,71.765 50.87,69.86 C24.1@50.87,67.81 ; C24.1@50.87,67.615 C24.1@50.87,67.81 ; C24.1@50.87,67.615 50.97,67.81 C24.1@50.87,67.81
NetC23_2: C23.2 C24.2 R21.1 R22.1 U4.2 U5.20 | length 31.5
  Component Side w0.45: U5.20@48.26,54.05 50.152,54.05 55.092,58.99 56.739,58.99 57.81,60.061 57.81,64.802 56.072,66.54 53.65,66.54 C24.2@52.87,67.32 ; U4.2@55.68,70.35 55.73,70.4 R22.1@57.55,70.4
  Component Side w1: C24.2@52.87,67.32 52.87,69.86 C23.2@52.87,71.765 ; 53.252,70.35 U4.2@55.68,70.35
NetC27_2: C27.2 R23.2 U5.15 | length 9
  Component Side w0.45: U5.15@48.26,57.3 48.26,59.71 R23.2@48.95,60.4 48.95,61.45 49.25,61.75 51.36,61.75 C27.2@52.775,60.335
NetC30_2: C30.2 U5.21 | length 17.9
  Component Side w0.45: v1(41.5,58) 41.505,57.995 C30.2@43.25,57.995 ; U5.21@48.26,53.4 51.589,53.4 v1(52.024,53.835)
  Solder Side w0.45: v1(41.5,58) 41.705,58 45.87,53.835 v1(52.024,53.835)
NetC31_2: C31.2 U5.22 | length 18
  Component Side w0.45: v1(41.5,56) 41.59,56.09 C31.2@43.25,56.09 ; U5.22@48.26,52.75 51.25,52.75 v1(52,52)
  Solder Side w0.45: v1(41.5,56) 41.8,56 45.085,52.715 51.285,52.715 v1(52,52)
NetC37_1: C37.1 C38.1 U9.85 | length 6.9
  Component Side w0.25: C38.1@69.55,48.4 C38.1@69.85,48.7 ; C38.1@70.11,48.71 C38.1@70.36,48.71 ; C38.1@70.35,48.7 C38.1@70.36,48.71 ; U9.85@74.675,48.7 74.665,48.71 C38.1@70.36,48.71
  Component Side w0.45: C37.1@67.75,48.1 68.05,48.4 C38.1@69.55,48.4
NetC39_1: C39.1 R35.1 U9.50 | length 31.5
  Component Side w0.25: U9.50@89.725,53.2 90.639,53.2 91.003,53.564 v1(91.003,54.208) ; v1(96.25,52.75) 96.46,52.96 114.398,52.96 114.96,52.398 114.96,51.19 R35.1@116,50.15 116.05,50.1 C39.1@118,50.1
  Solder Side w0.25: v1@91.092,53.94 91.322,53.71 93.647,53.71 93.832,53.525 94.159,53.525 94.976,53.525 95.751,52.75 v1(96.25,52.75)
NetC40_2: C40.2 U9.63 Y1.1 | length 14.1
  Component Side w0.25: U9.63@82.2,54.725 82.2,60.4 83,61.2 Y1.1@86.25,61.2
  Component Side w0.45: C40.2@86.2,65.2 86.2,61.25 Y1.1@86.25,61.2
NetC41_2: C41.2 U9.64 Y1.2 | length 18.1
  Component Side w0.25: C41.2@77.8,65.2 77.8,61.25 Y1.2@77.75,61.2 80.8,61.2 81.7,60.3 U9.64@81.7,54.725
  Component Side w0.45: Y1.2@76.9,61.2 Y1.2@77.035,61.335 ; Y1.2@77.75,61.2 77.75,65.15 C41.2@77.8,65.2
NetC42_1: C42.1 R36.1 U9.93 | length 5
  Component Side w0.25: R36.1@70.6,43.45 72.55,43.45 C42.1@72.6,43.5 72.6,44.2 73.1,44.7 U9.93@74.675,44.7
NetC46_1: C46.1 R71.1 U9.30 | length 5.3
  Component Side w0.25: U9.30@89.725,43.2 92.6,43.2 C46.1@92.8,43 92.8,41.25 R71.1@92.55,41
NetC51_2: C51.2 C52.2 C53.2 C54.2 C55.2 D2.2 D5.2 L3.1 P16.1 P17.1 R40.1 U11.1 U12.5 U14.1 U16.1 U18.1 U20.1 | length 208.2
  Component Side w1: U11.1@19.46,63.07 U11.1@19.8,63.07 ; U14.1@19.8,77.98 19.905,78.085 37.345,78.085 L3.1@40.83,81.57
  Solder Side w1: C54.2@17.4,30.1 19.52,30.1 U18.1@19.8,29.82 21.62,29.82 21.8,30 ; C53.2@17.6,46.7 19.8,46.7 21.7,46.7 ; C51.2@17.6,63.1 19.8,63.1 21.665,63.1 ; C52.2@17.6,78.1 19.68,78.1 U14.1@19.8,77.98 21.665,76.115 21.665,63.1 ; 21.7,63.1 21.665,63.1 ; D5.2@25.6,16 25.8,15.8 26.6,15 P17.1@26.6,13 26.6,10.5 26.5,10.4 ; L3.1@40.83,81.57 D2.2@43.91,81.57 ; U20.1@89.8,7.5 90.35,6.95 C55.2@90.35,5.25 90.35,2.9 89.85,2.4 38.6,2.4 30.6,10.4 26.5,10.4 ; 21.665,63.1 21.665,46.935 21.8,46.8 21.8,30 ; 21.8,30 21.8,21.805 U12.5@21.195,21.2 19.84,21.2 R40.1@18.38,22.66 15.279,22.66 12.91,20.291 12.91,16 15.91,13 P16.1@17.5,13 17.5,11.25 18.35,10.4 26.5,10.4
NetC59_1: C59.1 R68.2 U21.3 | length 6
  Component Side w0.75: C59.1@64.5,78.6 66.99,78.6 U21.3@67.15,78.76 68.64,78.76 R68.2@69.91,77.49
NetC59_2: C59.2 R63.2 U21.7 | length 25.7
  Component Side w0.5: C59.2@62.7,78.8 62.7,78.936 63.964,80.2 65.461,80.2 65.95,80.689 65.95,82.95 67.685,84.685 73.049,84.685 73.685,84.049 73.685,83.151 73.57,83.036 73.57,77.42 U21.7@74.77,76.22 U21.7@74.79,76.2
  Component Side w0.75: U21.7@74.79,76.2 R63.2@76.95,76.2
NetCON2_C_1: CON2_C.1 R15_C.2 | length 28.9
  Component Side w1: CON2_C.1@119,85 119,81 121.065,78.935 130.565,78.935 132.5,77 132.5,75 130.51,73.01 R15_C.2@125.54,73.01
NetCON2_X_1: CON2_X.1 R15_X.2 | length 9.2
  Component Side w0.5: R15_X.2@120.04,11.01 123.03,14 CON2_X.1@128,14
NetCON8_1: CON8.1 R65.2 | length 5.9
  Component Side w1: CON8.1@56.4,81.6 R65.2@62.35,81.6
NetD1_2: D1.2 L2.1 U18.3 | length 12.9
  Solder Side w1: L2.1@10.795,37.065 L2.1@10.7,37.16 10.7,34.2 10.7,33.88 D1.2@10.83,33.75 ; 11.395,37.065 17.635,37.065 U18.3@19.8,34.9
NetD3_2: D3.2 L4.1 U20.6 | length 8.1
  Component Side w1: L4.1@98.84,10.88 99.12,10.88 U20.6@102.5,7.5
  Solder Side w1: L4.1@98.84,10.88 D3.2@98.84,13.96
NetD4_1: D4.1 L5.1 U20.4 | length 10.8
  Solder Side w1: D4.1@91.3,14.05 91.22,13.97 L5.1@91.22,10.88 91.223,10.88 94.603,7.5 U20.4@97.42,7.5
NetF1_1: F1.1 P9.1 P11.1 R33.2 | length 27.5
  Component Side w1: R33.2@4.2,12.65 4.2,13.55 F1.1@10.03,19.38 8.82,19.38 6.2,22 P9.1@5,22 5,23.65 6.95,25.6 6.95,30.764 5.114,32.6 P11.1@5,32.6
NetL1_K: L1.K R26.2 | length 1.6
  Component Side w0.5: L1.K@40.6,73.7 R26.2@40.6,75.35
NetLED1_A: LED1.A R9.1 | length 2
  Component Side w0.25: R9.1@96.4,62.55 LED1.A@96.4,64.5
NetLED2_A: LED2.A R32.1 | length 1.8
  Component Side w0.5: R32.1@88.95,27 LED2.A@90.75,27
NetLED3_A: LED3.A R37.1 | length 1.8
  Component Side w0.5: R37.1@88.95,34.5 LED3.A@90.75,34.5
NetLED4_A: LED4.A R38.1 | length 1.8
  Component Side w0.5: R38.1@88.95,32 LED4.A@90.75,32
NetLED5_A: LED5.A R39.1 | length 1.8
  Component Side w0.5: R39.1@88.95,29.5 LED5.A@90.75,29.5
NetLED6_K: LED6.K R51.2 | length 2.1
  Component Side w0.45: LED6.K@88.045,15.555 R51.2@88.045,17.685
NetLED7_A: LED7.A R47.1 | length 1.9
  Component Side w0.5: LED7.A@45.7,84.6 R47.1@47.55,84.6
NetLED8_A: LED8.A R48.1 | length 2.1
  Component Side w0.45: LED8.A@95.665,15.555 R48.1@95.665,17.685
NetLED9_A: LED9.A R49.1 | length 4.4
  Component Side w1: LED9.A@9,6.5 R49.1@9,10.95
NetLED10_A: LED10.A R33.1 | length 4.4
  Component Side w1: LED10.A@4.2,6.5 R33.1@4.2,10.95
NetLED11_A: LED11.A R70.1 | length 2.7
  Component Side w0.5: R70.1@54.5,35.55 55.45,35.55 56,35 LED11.A@57,35
NetLED12_A: LED12.A R72.1 | length 4.5
  Component Side w1: LED12.A@13.2,6.5 R72.1@13.2,10.95
NetP2_C_2: P2_C.2 R14_C.1 R19_C.2 U3_C.5 | length 26.1
  Component Side w0.5: U3_C.5@115.88,68.171 U3_C.5@115.88,68.48 118.56,71.16 ; R19_C.2@119.79,71.16 118.56,71.16 ; P2_C.2@130.79,76 128.99,77.8 121.55,77.8 R14_C.1@121.54,77.81 118.276,77.81 117.415,76.949 117.415,72.305 118.56,71.16
NetP2_X_2: P2_X.2 R14_X.1 R19_X.2 U3_X.5 | length 17.5
  Component Side w0.5: U3_X.5@110.38,6.171 U3_X.5@110.38,6.48 113.06,9.16 ; P2_X.2@112.92,18.25 113.06,18.11 113.06,15.71 ; R19_X.2@114.29,9.16 113.06,9.16 ; R14_X.1@116.04,15.81 113.16,15.81 113.06,15.71 ; 113.06,9.16 113.06,15.71
NetR1_1: R1.1 R3.2 U1.6 | length 12.6
  Component Side w0.25: U1.6@89.4,76.365 91.185,76.365 R1.1@91.8,75.75 92.76,76.71 92.76,82.76 93.9,83.9 R3.2@94.8,83.9
NetR1_2: R1.2 R2.1 U1.2 | length 19.5
  Component Side w0.5: U1.2@84.6,77.635 82.835,77.635 82.15,76.95 82.15,73.614 84.157,71.607 85.339,70.425 88.661,70.425 91.75,73.514 91.75,73.85 R1.2@91.8,73.85 91.8,73.564 91.943,73.707 R1.2@92.2,73.964
NetR2_2: R2.2 R64.2 U21.1 | length 22.1
  Component Side w0.75: R64.2@64.45,73.412 R64.2@64.45,73.6 64.53,73.68 U21.1@67.15,73.68 67.15,71.587 69.537,69.2 79.85,69.2 R2.2@82.25,71.6
NetR10_C_1: R10_C.1 R11_C.1 R18_C.2 U3_C.2 | length 6.7
  Component Side w0.5: R18_C.2@119.79,72.61 R11_C.1@121.54,72.61 122.55,72.61 U3_C.2@123.5,73.56 U3_C.2@123.56,73.56
  Solder Side w0.5: U3_C.2@123.5,73.56 124.16,73.56 R10_C.1@125.5,74.9